# Altium PCB DG_V3.PcbDoc
Units mm, origin at the board's own origin, x right, y up, seen from the top; angles counter-clockwise.
Board outline 103.5 x 49.53 mm, 2 copper layers (Top Layer, Bottom Layer); 132 components, 84 nets, 431 pads, 72 vias.
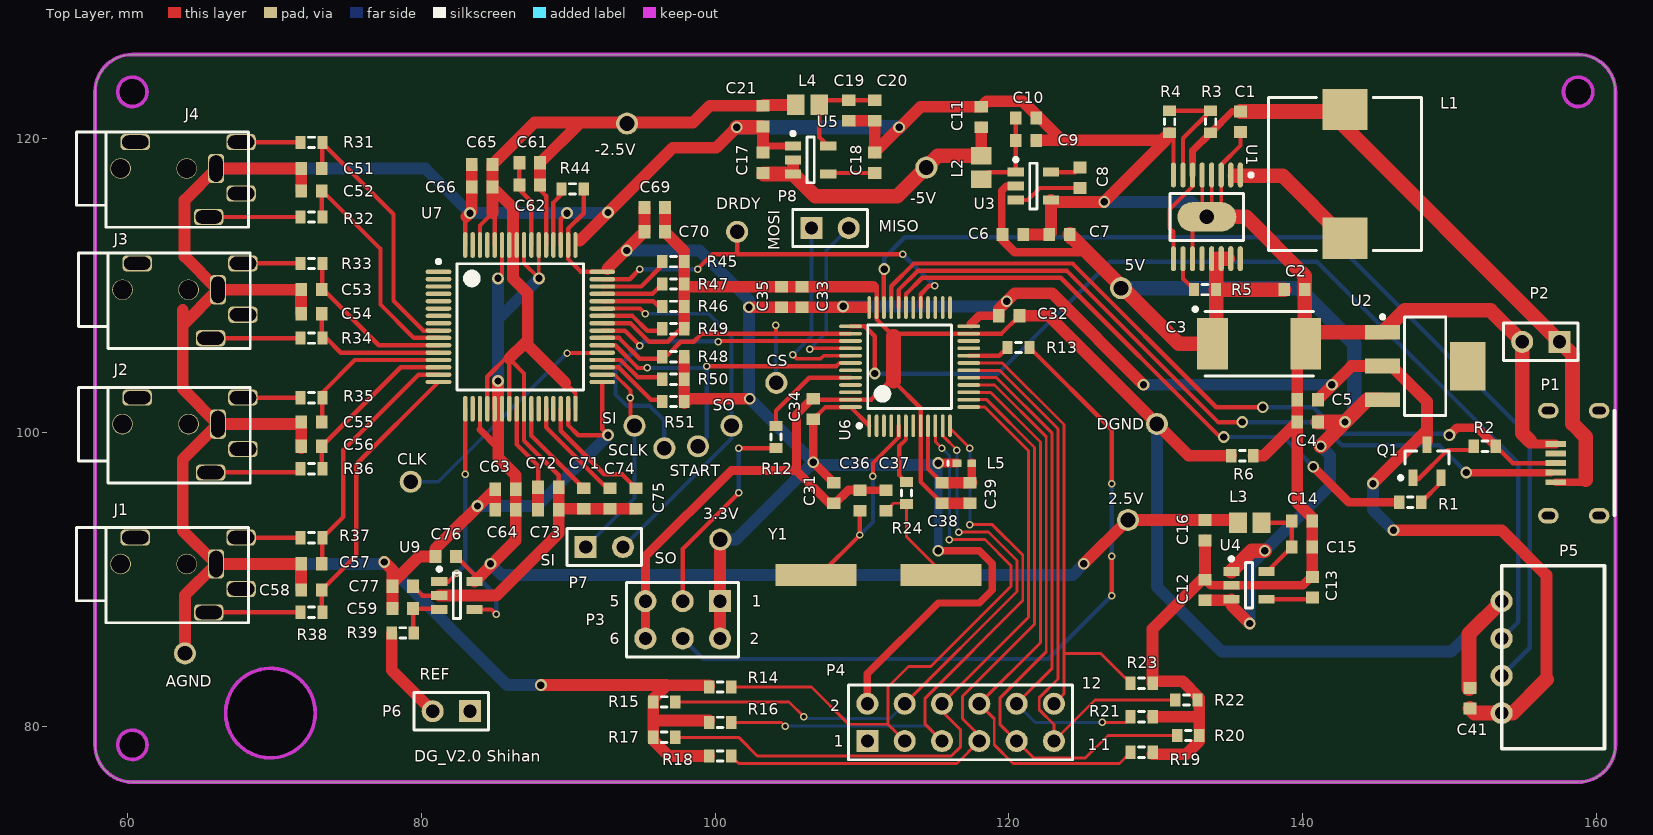
[diagram p0: Top Layer view]
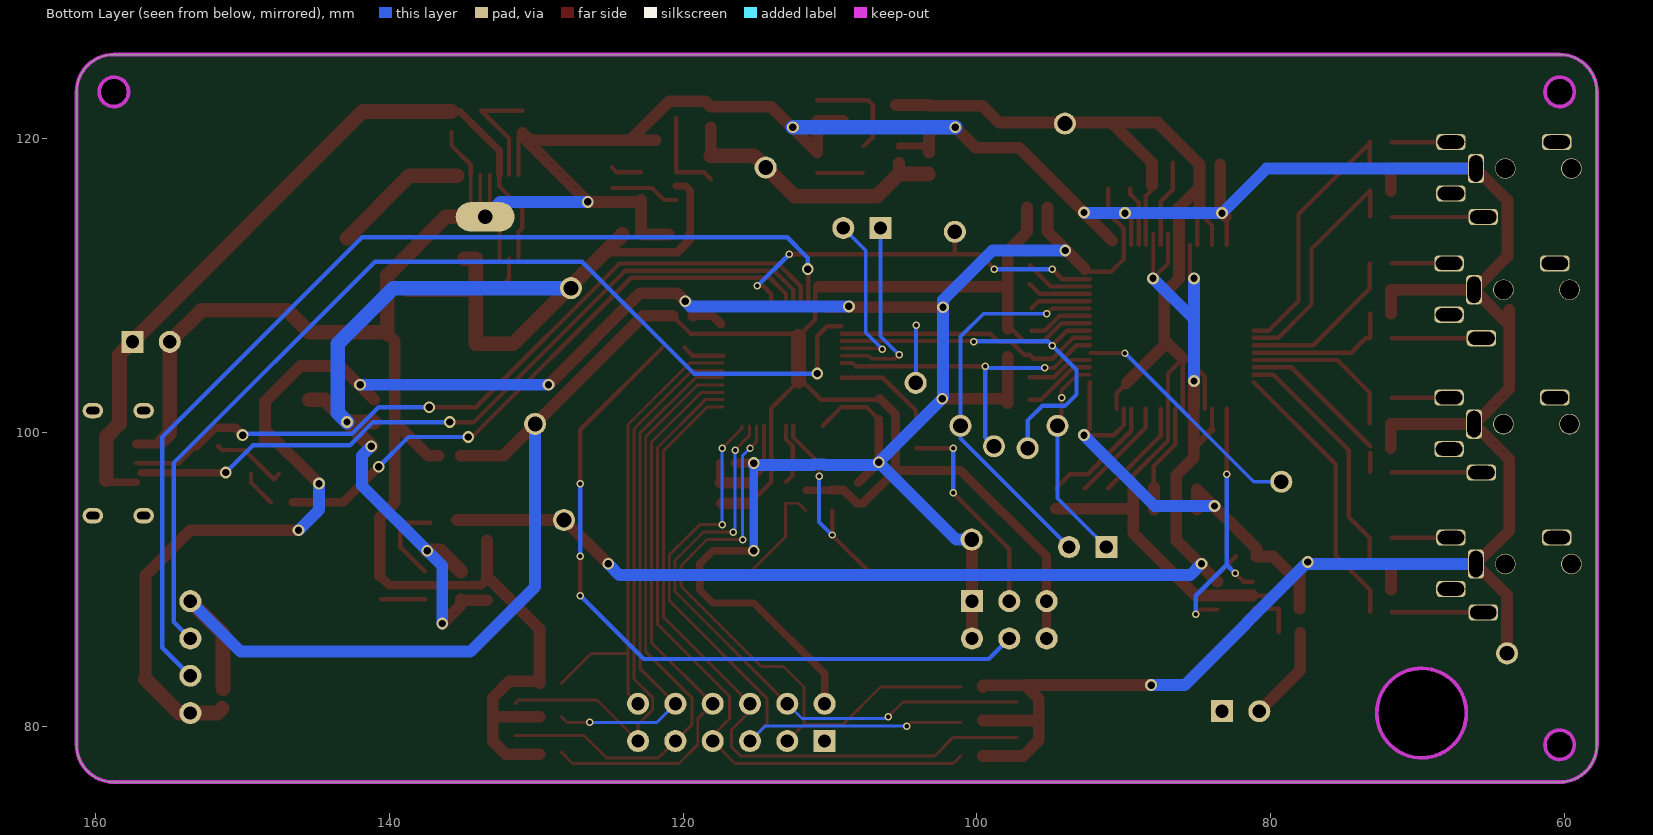
[diagram p1: Bottom Layer view, seen from below]

## Layer stack, top to bottom
Top Solder: solder mask 0.0102, Solder Resist, Dk 3.5
Top Layer: signal copper 0.0356
Dielectric 1: dielectric 0.32, FR-4, Dk 4.8
Bottom Layer: signal copper 0.0356
Bottom Solder: solder mask 0.0102, Solder Resist, Dk 3.5

## Board outline
60.325,76.2 cw(c60.325,78.74) 57.785,78.74 57.785,123.19 cw(c60.325,123.19) 60.325,125.73 158.75,125.73 cw(c158.75,123.19) 161.29,123.19 161.29,78.74 cw(c158.75,78.74) 158.75,76.2
cut-out: 157.75,123.19 ccw(c158.75,123.19) 158.75,122.19 ccw(c158.75,123.19) 159.75,123.19 ccw(c158.75,123.19) 158.75,124.19 ccw(c158.75,123.19)
cut-out: 60.325,122.19 cw(c60.325,123.19) 59.325,123.19 cw(c60.325,123.19) 60.325,124.19 cw(c60.325,123.19) 61.325,123.19 cw(c60.325,123.19)
cut-out: 60.325,77.74 cw(c60.325,78.74) 59.325,78.74 cw(c60.325,78.74) 60.325,79.74 cw(c60.325,78.74) 61.325,78.74 cw(c60.325,78.74)
cut-out: 69.723,77.849 cw(c69.723,80.899) 66.673,80.899 cw(c69.723,80.899) 69.723,83.949 cw(c69.723,80.899) 72.773,80.899 cw(c69.723,80.899)

## Design rules (kind name [scope] priority, off if disabled: settings)
Clearance [All] p1: gap=0.15
PolygonConnect [All] p1: connectstyle=Relief reliefconductorwidth=0.254 reliefentries=4 polygonreliefangle="90 Angle" airgapwidth=0.254
RoutingVias [All] p1: holewidth=0.5 width=0.8 viastyle="Through Hole" minholewidth=0.305 minwidth=0.508 maxholewidth=7 maxwidth=7
SolderMaskExpansion [All] p1: expansion=0.102
Width [All] p1: maxlimit=1 minlimit=0.15 preferedwidth=0.2
30 further rules are at their usual default settings.

## Classes and differential pairs
component class DG_V3: C51 C52 C53 C54 C55 C56 C57 C58 C59 C61 C62 C63 C64 C65 C66 C69 C70 C71 C72 C73 C74 C75 C76 C77 CLK CS DRDY J1 J2 J3 J4 P6 P7 P8 R31 R32 R33 R34 R35 R36 R37 R38 R39 R44 R45 R46 R47 R48 R49 R50 R51 SCLK SI SO START U7 U9
component class PowerSupply: 2.5V 3.3V 5V -2.5V -5V AGND C1 C2 C3 C4 C5 C6 C7 C8 C9 C10 C11 C12 C13 C14 C15 C16 C17 C18 C19 C20 C21 DGND L1 L2 L3 L4 P1 P2 Q1 R1 R2 R3 R4 R5 R6 U1 U2 U3 U4 U5
component class MPU: C31 C32 C33 C34 C35 C36 C37 C38 C39 C41 L5 P3 P4 P5 R12 R13 R14 R15 R16 R17 R18 R19 R20 R21 R22 R23 R24 U6 Y1

## Components (designator, comment, footprint, x,y, rotation, side; value= is the part's Value field where it differs from the comment)
2.5V "TP" TestPort 128.081,94.045 r90 top
3.3V "TP" TestPort 100.33,92.71 r90 top
5V "TP" TestPort 127.635,109.855 r0 top
-2.5V "TP" TestPort 93.98,121.031 r90 top
-5V "TP" TestPort 114.351,118.034 r90 top
AGND "TP" TestPort 63.881,84.963 r90 top
C1 "10uF" 1608[0603] 135.763,121.158 r90 top
C2 "2.2uF" 1608[0603] 139.446,109.728 r180 top
C3 "220uF" 6TPF220M5L 137.033,106.045 r0 top
C4 "10uF" 1608[0603] 140.335,100.711 r180 top
C5 "10uF" 1608[0603] 140.335,102.235 r180 top
C6 "10uF" 1608[0603] 120.269,113.476 r180 top
C7 "1uF" 1608[0603] 123.444,113.476 r0 top
C8 "1uF" 1608[0603] 124.841,117.348 r90 top
C9 "10uF" 1608[0603] 121.158,119.888 r180 top
C10 "1uF" 1608[0603] 121.158,121.412 r180 top
C11 "10uF" 1608[0603] 118.11,121.477 r270 top
C12 "1uF" 1608[0603] 133.35,89.281 r270 top
C13 "1uF" 1608[0603] 140.659,89.469 r270 top
C14 "2.2uF" 1608[0603] 139.954,93.98 r180 top
C15 "10uF" 1608[0603] 139.954,92.202 r180 top
C16 "10uF" 1608[0603] 133.35,93.345 r90 top
C17 "2.2uF" 1608[0603] 103.251,118.364 r270 top
C18 "10nF" 1608[0603] 110.871,118.364 r270 top
C19 "2.2uF" 1608[0603] 109.093,121.92 r90 top
C20 "10uF" 1608[0603] 110.871,121.92 r90 top
C21 "10uF" 1608[0603] 103.251,121.539 r90 top
C31 "100nF" 1608[0603] 108.077,95.885 r90 top
C32 "100nF" 1608[0603] 120.015,107.95 r180 top
C33 "100nF" 1608[0603] 105.918,109.22 r270 top
C34 "100nF" 1608[0603] 106.68,101.6 r270 top
C35 "10uF" 1608[0603] 104.521,109.22 r270 top
C36 "20pF" 1608[0603] 109.855,95.377 r270 top
C37 "20pF" 1608[0603] 111.633,95.377 r270 top
C38 "1uF" 1608[0603] 115.443,95.885 r90 top
C39 "100nF" 1608[0603] 117.348,95.885 r90 top
C41 "10uF" 1608[0603] 151.384,81.915 r270 top
C51 "4.7nF" 1608[0603] 72.517,117.971 r0 top
C52 "4.7nF" 1608[0603] 72.517,116.447 r180 top
C53 "4.7nF" 1608[0603] 72.517,109.728 r0 top
C54 "4.7nF" 1608[0603] 72.517,108.077 r180 top
C55 "4.7nF" 1608[0603] 72.517,100.711 r0 top
C56 "4.7nF" 1608[0603] 72.517,99.06 r180 top
C57 "4.7nF" 1608[0603] 72.517,91.059 r0 top
C58 "4.7nF" 1608[0603] 72.517,89.281 r180 top
C59 "4.7nF" 1608[0603] 78.74,88.011 r0 top
C61 "100nF" 1608[0603] 87.376,118.364 r180 top
C62 "1uF" 1608[0603] 87.376,116.84 r180 top
C63 "1uF" 1608[0603] 85.725,96.139 r0 top
C64 "0.1uF" 1608[0603] 85.725,94.742 r0 top
C65 "1uF" 1608[0603] 84.136,118.237 r0 top
C66 "0.1uF" 1608[0603] 84.136,116.713 r0 top
C69 "1uF" 1608[0603] 95.885,115.316 r180 top
C70 "0.1uF" 1608[0603] 95.885,113.665 r180 top
C71 "1uF" 1608[0603] 91.059,95.504 r90 top
C72 "10uF" 1608[0603] 88.646,96.266 r0 top
C73 "100nF" 1608[0603] 88.646,94.742 r0 top
C74 "100uF" 1608[0603] 92.837,95.504 r90 top
C75 "1uF" 1608[0603] 94.615,95.504 r90 top
C76 "1uF" 1608[0603] 81.661,91.567 r0 top
C77 "1uF" 1608[0603] 78.74,89.535 r0 top
CLK "TP" TestPort 79.248,96.647 r90 top
CS "TP" TestPort 104.14,103.378 r90 top
DGND "TP" TestPort 130.048,100.584 r90 top
DRDY "TP" TestPort 101.473,113.665 r90 top
J1 "PJ_230" PJ_230 63.627,90.297 r0 top
J2 "PJ_230" PJ_230 63.754,99.822 r0 top
J3 "PJ_230" PJ_230 63.754,108.966 r0 top
J4 "PJ_230" PJ_230 63.627,117.221 r0 top
L1 "6.8uH" B82464G4682M 142.875,117.602 r270 top
L2 "3.3uH" 2029 118.11,118.048 r90 top
L3 "3.3uH" 2029 136.398,93.853 r180 top
L4 "3.3uH" 2029 106.299,122.301 r180 top
L5 "GZ1005D601TF" 0402-A 116.967,97.917 r0 top
P1 "Micro-USB" Micro-USB 157.226,97.917 r90 top
P2 "Header 2" HDR1X2 157.48,106.172 r180 top
P3 "Jumper" HDR2X3 100.33,88.519 r180 top
P4 "Header 6X2" HDR2X6 110.363,78.994 r0 top
P5 "Header 4" XH4 153.543,84.709 r270 top
P6 "Header 2" HDR1X2 83.312,81.026 r180 top
P7 "Header 2" HDR1X2 91.186,92.202 r0 top
P8 "Header 2" HDR1X2 106.553,113.919 r0 top
Q1 "PNP" SOT-23B_N 148.463,98.044 r90 top
R1 "10K" J1-0603 147.32,95.25 r0 top
R2 "1K" J1-0603 152.4,99.06 r0 top
R3 "1M" J1-0603 133.731,121.158 r270 top
R4 "240K" J1-0603 130.937,121.158 r90 top
R5 "100K" J1-0603 133.35,109.728 r0 top
R6 "0K" J1-0603 135.89,98.425 r180 top
R12 "10K" J1-0603 104.14,99.695 r270 top
R13 "10K" J1-0603 120.65,105.791 r180 top
R14 "15K" J1-0603 100.342,82.677 r180 top
R15 "15K" J1-0603 96.532,81.661 r180 top
R16 "15K" J1-0603 100.342,80.264 r180 top
R17 "15K" J1-0603 96.532,79.248 r180 top
R18 "15K" J1-0603 100.342,77.978 r180 top
R19 "10K" J1-0603 129.032,78.232 r0 top
R20 "10K" J1-0603 132.207,79.375 r0 top
R21 "10K" J1-0603 129.032,80.645 r0 top
R22 "10K" J1-0603 132.08,81.788 r0 top
R23 "10K" J1-0603 129.032,82.931 r0 top
R24 "0K" J1-0603 113.03,95.885 r90 top
R31 "4.99K" J1-0603 72.517,119.749 r0 top
R32 "4.99K" J1-0603 72.517,114.669 r0 top
R33 "4.99K" J1-0603 72.517,111.506 r0 top
R34 "4.99K" J1-0603 72.517,106.426 r0 top
R35 "4.99K" J1-0603 72.517,102.362 r0 top
R36 "4.99K" J1-0603 72.517,97.536 r0 top
R37 "4.99K" J1-0603 72.517,92.837 r0 top
R38 "4.99K" J1-0603 72.517,87.757 r0 top
R39 "4.99K" J1-0603 78.74,86.36 r180 top
R44 "10K" J1-0603 90.297,116.586 r180 top
R45 "10K" J1-0603 97.155,111.633 r180 top
R46 "10K" J1-0603 97.155,108.585 r180 top
R47 "10K" J1-0603 97.155,110.109 r180 top
R48 "10K" J1-0603 97.155,105.156 r180 top
R49 "10K" J1-0603 97.155,107.061 r180 top
R50 "10K" J1-0603 97.155,103.632 r180 top
R51 "10K" J1-0603 97.155,102.108 r180 top
SCLK "TP" TestPort 96.52,98.933 r90 top (schematic designator CLK)
SI "TP" TestPort 94.488,100.457 r90 top
SO "TP" TestPort 101.092,100.457 r90 top
START "TP" TestPort 98.806,99.06 r90 top
U1 "TPS6103" TI_PWP_G16 133.477,114.681 r270 top
U2 "LM1117MPX-3.3" MP04A_N 148.336,104.521 r0 top
U3 "TPS60403DBVR" TI-DBV5_N 121.666,116.778 r0 top
U4 "TPS73225DBVR" TI-DBV5_N 136.341,89.596 r0 top
U5 "TPS72325DBVR" TI-DBV5_N 106.496,118.552 r0 top
U6 "STM32F103C6" STM32F103C8T6 110.49,100.457 r90 top
U7 "ADS1299" PQFP-64N 86.741,107.188 r0 top
U9 "OPA376AIDBVR" TI-DBV5_N 82.423,88.9 r0 top
Y1 "XTAL" Crystal_HCM49 111.125,90.297 r0 top

## Footprints (in the part's own frame and the unit in brackets; to place one, negate y for a bottom-side part, rotate by r counter-clockwise, add the part's x,y. Pads: shape width x height; smd on the part's side, far side on the other; paste and mask are expansions set on the pad)
6TPF220M5L [mm] "Molded Capacitor, 2-Leads, Body 7.3x4.3mm, IPC Medium Density"
  rect 2.1x3.5 smd: 1(-3.175,0) 2(3.175,0)
  silkscreen extent -4.47,-2.2 3.7,2.47, body extent -3.65,-2.15 3.65,2.15, height 2.8
0402-A [mm] "Chip Inductor, Body 1.0x0.5mm, IPC High Density"
  rect 0.6x0.5 smd: 1(-0.5,0) 2(0.5,0)
  silkscreen extent -1.1,-0.15 -1.1,0.15, body extent -0.55,-0.3 0.55,0.3, height 0.55
1608[0603] [mm] "Chip Capacitor, Body 1.6x0.8mm, IPC High Density"
  rect 0.8x0.9 smd: 1(-0.7,0) 2(0.7,0)
  body extent -0.87,-0.48 0.87,0.48, height 1.3
2029 [mm] "Chip Inductor, Body 2.0x1.2mm, IPC High Density"
  rect 1.2x1.4 smd: 1(-0.8,0) 2(0.8,0)
  body extent -1.1,-0.7 1.1,0.7, height 0.55
B82464G4682M [mm] "Precision Wire Wound Inductor, 2-Leads, Body 10.4x10.4mm, IPC Medium Density"
  rect 2.8x3.05 smd: 1(-4.375,0) 2(4.375,0)
  silkscreen extent -5.2,-5.2 5.2,5.2, body extent -5.2,-5.2 5.2,5.2, height 4.8
Crystal_HCM49 [mm]
  rect 5.5x1.5 smd: 1(-4.25,0) 2(4.25,0)
HDR1X2 [mm] "Connector; Header; 2 Position"
  rect 1.5x1.5 hole 0.9: 1(0,0)
  round 1.5 hole 0.9: 2(2.54,0)
  silkscreen extent -1.27,-1.27 3.81,1.27
HDR2X3 [mm] "Connector; Header; 3x2 Position"
  rect 1.5x1.5 hole 0.9: 1(0,0)
  round 1.5 hole 0.9: 2(0,2.54) 3(2.54,0) 4(2.54,2.54) 5(5.08,0) 6(5.08,2.54)
  silkscreen extent -1.27,-1.27 6.35,3.81
HDR2X6 [mm] "Connector; Header; 6x2 Position"
  rect 1.5x1.5 hole 0.9: 1(0,0)
  round 1.5 hole 0.9: 2(0,2.54) 3(2.54,0) 4(2.54,2.54) 5(5.08,0) 6(5.08,2.54) 7(7.62,0) 8(7.62,2.54) 9(10.16,0) 10(10.16,2.54) 11(12.7,0) 12(12.7,2.54)
  silkscreen extent -1.27,-1.27 13.97,3.81
J1-0603 [mm] "Chip Resistor, Body 1.6x0.8mm, IPC High Density"
  rect 0.7x0.9 smd: 1(-0.75,0) 2(0.75,0)
  silkscreen extent -0.2,-0.35 0.2,0.35, body extent -0.85,-0.48 0.85,0.48, height 0.9
Micro-USB [mm]
  oval 1.05x1.4 hole 0.5 slot 0.9 at 90 deg: 0(-3.575,-2.95) 0(-3.575,0.5) 0(3.575,-2.95) 0(3.575,0.5)
  rect 0.4x1.4 smd: 1(-1.3,0) 2(-0.65,0) 3(0,0) 4(0.65,0) 5(1.3,0)
  silkscreen extent -3.56,-4 3.56,-4
MP04A_N [mm] "SOT223, 4-Leads, Body 6.5x3.5mm, Pitch 2.3mm, Lead Span 7mm, IPC Medium Density"
  rect 2.4x1 smd: 1(-2.9,2.3) 2(-2.9,0) 3(-2.9,-2.3)
  rect 2.4x3.3 smd: 4(2.9,0)
  silkscreen extent -3.02,-3.35 1.4,3.47, body extent -1.85,-3.35 1.85,3.35, height 1.8
PJ_230 [mm] "Phone Jack 2.5mm"
  round 1.4 hole 1.3: 1(-4.1,0.75) 1(0.4,0.75)
  rrect50% 2x1.1 hole 0.9 slot 1.8 at 0 deg: 2(1.9,-2.55) 3(-3.1,2.55) 5(4.1,2.55) 6(4.1,-0.95)
  rrect50% 1.1x2 hole 0.9 slot 1.8 at 90 deg: 4(2.4,0.75)
  silkscreen extent -7.1,-3.25 4.6,3.25
PQFP-64N [mm] "TSQFP, 64-Leads, Body 12.2x12.2mm (max), Pitch 0.50mm, IPC Medium Density ADS1299"
  oval 1.75x0.3 smd: 1(-5.575,3.75) 2(-5.575,3.25) 3(-5.575,2.75) 4(-5.575,2.25) 5(-5.575,1.75) 6(-5.575,1.25) 7(-5.575,0.75) 8(-5.575,0.25) 9(-5.575,-0.25) 10(-5.575,-0.75) 11(-5.575,-1.25) 12(-5.575,-1.75) 13(-5.575,-2.25) 14(-5.575,-2.75) 15(-5.575,-3.25) 16(-5.575,-3.75) 33(5.575,-3.75) 34(5.575,-3.25) 35(5.575,-2.75) 36(5.575,-2.25) 37(5.575,-1.75) 38(5.575,-1.25) 39(5.575,-0.75) 40(5.575,-0.25) 41(5.575,0.25) 42(5.575,0.75) 43(5.575,1.25) 44(5.575,1.75) 45(5.575,2.25) 46(5.575,2.75) 47(5.575,3.25) 48(5.575,3.75)
  oval 0.3x1.75 smd: 17(-3.75,-5.575) 18(-3.25,-5.575) 19(-2.75,-5.575) 20(-2.25,-5.575) 21(-1.75,-5.575) 22(-1.25,-5.575) 23(-0.75,-5.575) 24(-0.25,-5.575) 25(0.25,-5.575) 26(0.75,-5.575) 27(1.25,-5.575) 28(1.75,-5.575) 29(2.25,-5.575) 30(2.75,-5.575) 31(3.25,-5.575) 32(3.75,-5.575) 49(3.75,5.575) 50(3.25,5.575) 51(2.75,5.575) 52(2.25,5.575) 53(1.75,5.575) 54(1.25,5.575) 55(0.75,5.575) 56(0.25,5.575) 57(-0.25,5.575) 58(-0.75,5.575) 59(-1.25,5.575) 60(-1.75,5.575) 61(-2.25,5.575) 62(-2.75,5.575) 63(-3.25,5.575) 64(-3.75,5.575)
  silkscreen extent -5.7,-4.3 4.3,4.57, body extent -5,-5 5,5, height 1.2
SOT-23B_N [mm] "SOT23, 3-Leads, Body 2.9x1.3mm, Pitch 0.95mm, Lead Span 2.4mm, IPC Medium Density"
  rect 1.15x0.6 smd: 1(-1.125,0.95) 2(-1.125,-0.95) 3(1.125,0)
  silkscreen extent -1.25,-1.5 0.7,1.92, body extent -0.7,-1.5 0.7,1.5, height 1.14
STM32F103C8T6 [mm] "IC MCU 32BIT 64KB FLASH 48LQFP"
  oval 1.55x0.25 smd: 1(0,0) 2(0,-0.5) 3(0,-1) 4(0,-1.5) 5(0,-2) 6(0,-2.5) 7(0,-3) 8(0,-3.5) 9(0,-4) 10(0,-4.5) 11(0,-5) 12(0,-5.5) 25(8.05,-5.5) 26(8.05,-5) 27(8.05,-4.5) 28(8.05,-4) 29(8.05,-3.5) 30(8.05,-3) 31(8.05,-2.5) 32(8.05,-2) 33(8.05,-1.5) 34(8.05,-1) 35(8.05,-0.5) 36(8.05,0)
  oval 0.25x1.55 smd: 13(1.275,-6.775) 14(1.775,-6.775) 15(2.275,-6.775) 16(2.775,-6.775) 17(3.275,-6.775) 18(3.775,-6.775) 19(4.275,-6.775) 20(4.775,-6.775) 21(5.275,-6.775) 22(5.775,-6.775) 23(6.275,-6.775) 24(6.775,-6.775) 37(6.775,1.275) 38(6.275,1.275) 39(5.775,1.275) 40(5.275,1.275) 41(4.775,1.275) 42(4.275,1.275) 43(3.775,1.275) 44(3.275,1.275) 45(2.775,1.275) 46(2.275,1.275) 47(1.775,1.275) 48(1.275,1.275)
  silkscreen extent -0.12,-5.6 6.88,0.8, body extent 0.53,-6.25 7.52,0.75, height 1.6
TestPort [mm]
  round 1.5 hole 1: 0(0,-0.025)
TI-DBV5_N [mm] "SOT23, 5-Leads, Body 2.9x1.6mm, Pitch 0.95mm, IPC Medium Density"
  rect 1.1x0.6 smd: 1(-1.2,0.95) 2(-1.2,0) 3(-1.2,-0.95) 4(1.2,-0.95) 5(1.2,0.95)
  silkscreen extent -1.32,-1.55 0.25,1.92, body extent -0.87,-1.52 0.87,1.53, height 1.45
TI_PWP_G16 [mm]
  oval 1.7x0.35 smd: 1(-2.85,2.275) 2(-2.85,1.625) 3(-2.85,0.975) 4(-2.85,0.325) 5(-2.85,-0.325) 6(-2.85,-0.975) 7(-2.85,-1.625) 8(-2.85,-2.275) 9(2.85,-2.275) 10(2.85,-1.625) 11(2.85,-0.975) 12(2.85,-0.325) 13(2.85,0.325) 14(2.85,0.975) 15(2.85,1.625) 16(2.85,2.275)
  oval 2x4 hole 1: 3(0,0)
  Top Layer lines w0.254: 0.508,-1.016 0.549,-0.975 2.85,-0.975 ; -0.762,-0.325 -1.981,-0.325 -2.85,-0.325 ; -2.85,0.325 -0.945,0.325 -0.762,0.508 ; -2.85,0.975 -0.803,0.975 -0.762,1.016
  silkscreen extent -2.97,-2.5 1.6,3.13
XH4 [mm] "2.54mm"
  round 1.5 hole 0.9: 1(3.81,0) 2(1.27,0) 3(-1.27,0) 4(-3.81,0)
  silkscreen extent -6.22,0 6.23,7

## Part data
2.5V 3.3V 5V -2.5V -5V AGND CLK CS DGND DRDY SCLK SI SO START: library part TestPoint
C1 C2 C4 C5 C6 C7 C8 C9 C10 C11 C12 C13 C14 C15 C16 C17 C18 C19 C20 C21 C31 C32 C33 C34 C35 C36 C37 C38 C39 C41 C51 C52 C53 C54 C55 C56 C57 C58 C59 C61 C62 C63 C64 C65 C66 C69 C70 C71 C72 C73 C74 C75 C76 C77: library part Cap, "Capacitor"
C3: library part "Cap Pol1", "Polarized Capacitor (Radial)"
J1 J2 J3 J4: "Phone Jack"
L1 L2 L3 L4 L5: library part Inductor, "Inductor"
P2 P6 P7 P8: "Header, 2-Pin"
P3: library part "Header 3X2", "Header, 3-Pin, Dual row"
P4: "Header, 6-Pin, Dual row"
P5: "Header, 4-Pin"
Q1: "PNP Bipolar Transistor"
R1 R2 R3 R4 R5 R6 R12 R13 R14 R15 R16 R17 R18 R19 R20 R21 R22 R23 R24 R31 R32 R33 R34 R35 R36 R37 R38 R39 R44 R45 R46 R47 R48 R49 R50 R51: library part Res1, "Resistor"
U2: "800mA Low-Dropout Linear Regulator, 4-pin SOT-223"
U3: "-1.8 to -5.25 V, Inverting Charge Pump Regulator, 60 mA, 1.8 to 5.25 V Input with 2-Cell Alkaline / Nixx Input, -40 to 85 degC, 5-pin SOT23 (DBV5), Green (RoHS & no Sb/Br)"
U4: "Single Output Fast Transient Response LDO, 250 mA, Fixed 2.5 V Output, 1.7 to 5.5 V Input, with Reverse Current Protection, 5-pin SOT-23 (DBV), -40 to 85 degC, Green (RoHS & no Sb/Br)"
U5: "Single Output High PSRR LDO, 200 mA, Fixed -2.5 V Output, -10 to -2.7 V Input, 5-pin SOT-23 (DBV), -40 to 125 degC, Green (RoHS & no Sb/Br)"
U6: library part STM32F103C8T6, "IC MCU 32BIT 64KB FLASH 48LQFP"
U9: "Precision, Low Noise, Low Iq Operational Amplifier, 2.2 to 5.5 V, -40 to 125 degC, 5-pin SOT23 (DBV5), Green (RoHS & no Sb/Br)"
Y1: "Crystal Oscillator"

## Via types
v1: diameter 0.8, hole 0.5, Top Layer to Bottom Layer, 39 vias
v2: diameter 0.508, hole 0.305, Top Layer to Bottom Layer, 33 vias

## Nets (pads, with @x,y where several pads share a name; then routed paths per layer and width w, separated by ;. In a path a pad name is that pad's centre, name@x,y a point inside that pad or via, vN(x,y) a via of type N, cw(c..) or ccw(c..) an arc to the next point about the centre after c; other vN are vias at no path point)
5V: 5V.0 C2.2 C3.1 C4.1 C6.2 C7.2 C12.2 R5.2 U1.13 U1.14 U1.15 U2.3 U3.2 U4.1 U4.3 | length 86.7
  Top Layer w0.5: C6.2 119.516,113.476 119.516,116.468 119.826,116.778 U3.2
  Top Layer w0.6: C6.2 119.569,113.095 120.396,112.268 125.349,112.268 ; C7.2@124.144,113.095 C7.2
  Top Layer w0.8: C12.2 U4.3@135.076,88.581 ; U4.3 135.141,88.252 v1(136.398,86.995)
  Top Layer w1: C7.2 131.575,106.045 C3.1 ; R5.2 R5.2@134.112,109.728 ; C3.1@134.112,106.045 R5.2@134.112,109.728 ; 134.874,111.831 U1.14 134.112,111.831 R5.2@134.112,109.728 ; U4.1 136.543,91.948 v1(137.414,91.948) ; C2.2 R5.2@134.112,109.728 ; C4.1 v1(142.875,100.711) ; v1(141.224,99.06) v1(142.875,100.711) ; U2.3 144.385,102.221 v1(142.875,100.711)
  Bottom Layer w0.8: v1(136.398,86.995) 136.398,90.932 v1(137.414,91.948) 141.859,96.393 141.859,98.425 v1(141.224,99.06)
  Bottom Layer w1: 5V.0 139.725,109.83 143.51,106.045 143.51,101.346 v1(142.875,100.711)
+2.5V: 2.5V.0 C16.2 C63.2 C64.2 C76.2 L3.2 U7.19 U7.21 U7.22 U7.54 U7.56 U7.59 U9.5 | length 92.9
  Top Layer w0.254: U7.56@86.991,113.525 U7.56 86.991,111.51 87.991,110.51 U7.54 U7.54@87.991,113.525
  Top Layer w0.3: C76.2 83.623,90.305 U9.5 ; 83.991,100.203 U7.19 ; v1(85.217,110.49) 85.491,110.764 U7.59
  Top Layer w0.5: 83.991,100.203 85.187,99.006
  Top Layer w0.8: U9.5 86.425,92.652 C64.2 C63.2 86.425,97.09 85.241,98.274 85.241,101.613 ; 85.217,101.637 v1(85.217,103.505) ; v1(125.095,91.059) 128.081,94.045 C16.2 L3.2@135.406,94.045
  Bottom Layer w0.8: v1(84.709,91.059) 85.471,90.297 124.333,90.297 v1@125.034,90.998 ; v1(85.217,103.505) 85.217,107.696 ; v1(85.217,110.49) 85.217,107.696 ; v1(88.011,110.49) 85.217,107.696
-2.5V: -2.5V.0 C21.2 C61.1 C62.1 C65.2 C66.2 C71.1 C72.2 C73.2 C74.1 C75.1 C77.2 L4.2 U7.20 U7.23 U7.25 U7.32 U7.53 U7.57 U7.58 U7.60 U7.62 U9.2 | length 96.6
  Top Layer w0.3: C77.2 80.075,88.9 U9.2 ; U7.62 83.991,114.09 84.836,114.935 ; U7.20 84.491,103.795 85.864,105.168 ; U7.60 84.991,114.78 ; U7.23 85.991,105.041 ; 86.181,104.827 86.991,104.017 U7.25 86.991,99.445 89.346,97.09 C72.2 ; C62.1 88.076,116.521 88.491,116.106 U7.53 ; 89.789,103.378 90.491,102.676 U7.32
  Top Layer w0.8: U9.2 85.09,88.9 89.346,93.156 C73.2 C72.2 ; 84.836,114.935 C66.2 ; 85.991,105.041 87.058,106.108 89.789,103.378 ; 87.249,105.918 87.249,109.474 86.233,110.49 86.233,115.316 C66.2 ; C62.1 C61.1 90.805,121.093 ; C73.2@89.408,94.804 C71.1 C74.1 C75.1 ; C21.2 99.633,122.239 98.49,121.096 87.695,121.096 C65.2 C66.2 ; C21.2@103.313,122.301 L4.2
-5V: -5V.0 C11.2 C17.2 L2.2 U5.2 U5.3 | length 19.3
  Top Layer w0.8: U5.3 U5.2@105.296,118.364 ; L2.2 C11.2
  Top Layer w1: C17.2@103.313,117.602 U5.3 106.82,116.078 112.395,116.078 115.165,118.848 117.07,118.848 L2.2
AGND: AGND.0 C1.1 C2.1 C3.2 C4.2 C5.2 C6.1 C7.1 C9.1 C10.1 C11.1 C12.1 C13.1 C14.1 C15.1 C16.1 C17.1 C18.1 C19.1 C20.1 C21.1 C51.1 C52.2 C53.1 C54.2 C55.1 C56.2 C57.1 C58.2 C59.1 C63.1 C64.1 C65.1 C66.1 C76.1 C77.1 J1.4 J2.4 J3.4 J4.4 P1.5 P2.2 R4.1 R6.1 R14.2 R15.2 R16.2 R17.2 R18.2 R19.2 R20.2 R21.2 R22.2 R23.2 U1.3 U1.4 U1.5 U1.8 U1.11 U2.1 U3.4 U4.2 U5.1 U7.31 U7.33 U7.49 U7.51 U7.64 | length 366.9
  Top Layer w0.3: U7.64 82.991,114.614 v1@83.058,114.681 ; U7.51 89.491,114.51 v1(89.916,114.935) ; U7.31 89.991,100.509 90.678,99.822 v1(92.71,99.822) 92.316,100.216 U7.33 ; R4.1 131.202,120.143 U1.8 ; U1.3@132.715,114.681 U1.3@133.477,114.681 ; U1.3@134.452,117.531 134.452,118.228 135.763,119.539 C1.1
  Top Layer w0.5: 103.383,119.502 U5.1
  Top Layer w0.6: C12.1 133.735,89.596 U4.2 140,89.596 C13.1@140.654,90.25 ; 155.448,99.217 P1.5
  Top Layer w0.8: 63.754,107.316 J3.4 ; 63.754,108.332 63.754,102.972 J2.4 63.754,98.172 63.754,93.32 J1.4 ; AGND.0 63.906,88.926 J1.4 ; J2.4@66.166,100.584 71.817,100.584 C56.2@71.817,98.933 ; C51.1@71.678,117.971 J4.4 63.881,115.825 63.881,111.989 J3.4 ; C58.2@71.805,89.293 71.805,91.047 J1.4 ; C54.2@71.805,108.089 71.805,109.716 J3.4 ; C52.2 C51.1 ; v1(77.47,91.186) 78.04,90.616 C77.1@78.04,89.763 ; C59.1 C77.1 C77.1@78.04,89.763 ; v1@83.058,114.681 v1(83.312,114.935) 83.436,115.059 C66.1 C65.1 ; C64.1 C63.1 80.961,92.075 C76.1 79.844,91.567 C77.1@78.04,89.763 ; v1(88.138,82.804) 96.688,82.804 96.307,82.423 ; 90.782,113.053 v1(92.71,114.982) 97.108,119.38 100.076,119.38 v1(101.473,120.777) ; R17.2@95.782,79.043 96.847,77.978 R18.2 ; R17.2@95.782,79.121 95.782,81.866 96.704,82.788 99.592,82.788 R14.2 ; 95.782,80.391 R16.2@99.592,80.391 ; C17.1 C21.1 ; C19.1 C20.1 C18.1 113.984,122.177 115.889,122.177 C11.1 118.488,122.555 120.943,122.555 123.382,120.116 ; C6.1 C7.1 122.866,113.598 U3.4@122.866,115.698 ; C9.1 130.417,119.888 ; U3.4 U3.4@122.866,115.698 ; R19.2@129.782,78.105 132.08,78.105 132.957,78.982 132.957,80.645 ; R21.2 132.957,80.645 ; R23.2 129.782,86.641 133.122,89.981 C12.1 C16.1 ; R23.2@130.036,83.058 131.826,83.058 132.957,81.927 132.957,80.645 ; R4.1 130.417,119.888 ; R6.1 137.349,98.425 C4.2 ; C3.2@140.259,106.821 140.146,106.708 139.635,106.197 C5.2 C4.2 ; C13.1@140.654,90.25 C15.1 C14.1 140.654,94.208 139.635,95.227 C4.2 ; U3.4@122.866,115.698 v1(126.493,115.698) 130.683,119.888 130.417,119.888
  Top Layer w1: v1(101.473,120.777) C21.1@103.189,120.777 ; U1.3@133.477,114.681 136.144,114.681 140.146,110.679 C2.1 C3.2@140.146,106.708 ; C3.2@140.259,106.821 U2.1 146.946,108.331 152.781,108.331 P2.2 154.94,99.949 155.448,99.441
  Bottom Layer w0.8: J1.4 77.331,91.047 v1(77.47,91.186) 85.852,82.804 v1(88.138,82.804) ; J4.4 80.276,117.971 v1(83.312,114.935) v1(89.916,114.935) v1@92.663,114.935 ; v1(83.82,94.996) 87.884,94.996 v1(92.71,99.822) ; v1(126.493,115.698) 132.46,115.698 U1.3@133.477,114.681
  Bottom Layer w1: v1(101.473,120.777) v1(112.522,120.777)
AIN1N: J1.5 R37.1 | length 4
  Top Layer w0.3: J1.5 R37.1@71.757,92.847
AIN1P: J1.2 R38.1 | length 6.2
  Top Layer w0.3: J1.2@65.537,87.757 R38.1
AIN2N: J2.5 R35.1 | length 3.9
  Top Layer w0.3: J2.5 R35.1@71.757,102.372
AIN2P: J2.2 R36.1 | length 6.1
  Top Layer w0.3: J2.2@65.664,97.282 R36.1@71.767,97.282
AIN3N: J3.5 R33.1 | length 3.9
  Top Layer w0.3: J3.5 R33.1@71.757,111.516
AIN3P: J3.2 R34.1 | length 6.1
  Top Layer w0.3: J3.2@65.664,106.426 R34.1
AIN4N: J4.5 R31.1 | length 4
  Top Layer w0.3: J4.5 R31.1@71.767,119.771
AIN4P: J4.2 R32.1 | length 6.2
  Top Layer w0.3: J4.2 R32.1@71.767,114.671
BOOT0: R12.1 U6.44 | length 7
  Top Layer w0.3: R12.1 104.14,101.473 106.399,103.732 U6.44
BOOT1: R13.2 U6.20 | length 2.9
  Top Layer w0.3: U6.20 119.341,105.232 R13.2
CLK: CLK.0 U7.37 | length 16.6
  Top Layer w0.254: v2(89.916,105.41) U7.37@92.288,105.41
  Bottom Layer w0.254: CLK.0 81.153,96.647 v2(89.916,105.41)
DGND: C31.1 C32.1 C33.1 C34.1 C35.1 C36.1 C37.1 C38.1 C39.1 C41.1 C69.1 C70.1 DGND.0 P3.5 P3.6 P5.4 R6.2 R45.1 R46.1 R47.1 R49.1 U6.8 U6.23 U6.35 U6.47 U7.41 | length 155.8
  Top Layer w0.3: U7.41 94.238,107.438 95.504,106.172 96.774,106.172 97.663,107.061 R49.1 ; C34.1@106.748,102.232 U6.47 110.614,102.232 112.141,103.759 ; 110.99,109.866 U6.35 110.99,107.704 112.141,106.553 ; 111.962,106.732 U6.23 119.497,106.732 C32.1 ; 112.141,103.505 113.99,101.656 U6.8 113.994,100.453 113.994,98.479 113.99,98.475 113.99,96.638 C38.1
  Top Layer w0.5: C36.1 C37.1
  Top Layer w0.6: P3.6 P3.5 95.25,91.567 101.092,97.409 105.537,97.409 ; C34.1 106.594,102.3 105.537,101.243 105.537,97.409 ; C36.1 109.055,96.077 108.163,95.185 C31.1 107.761,95.185 105.537,97.409
  Top Layer w0.8: C69.1 C70.1 97.905,112.345 R45.1 R47.1 R46.1 R49.1 ; R47.1@98.094,109.92 110.744,109.92 ; C38.1 C39.1 ; C32.1 122.707,107.95 DGND.0 132.232,98.425 R6.2
  Top Layer w1: 112.141,103.505 112.141,106.553 ; C41.1@151.319,82.55 151.319,86.295 P5.4
  Bottom Layer w0.8: DGND.0 130.073,89.51 134.493,85.09 150.114,85.09 P5.4
DVDD+3.3V: 3.3V.0 C5.1 C31.2 C32.2 C33.2 C34.2 C35.2 C41.2 C69.2 C70.2 L5.1 P3.1 P3.2 P4.2 P5.1 Q1.3 R44.1 R48.1 R50.1 R51.1 U2.2 U6.1 U6.24 U6.36 U6.48 U7.48 U7.50 | length 196.4
  Top Layer w0.3: R44.1 91.047,114.923 89.991,113.867 U7.50 89.991,111.812 90.865,110.938 U7.48 ; C34.2 107.512,101.732 U6.48 U6.1
  Top Layer w0.5: P4.2 110.363,83.566 115.189,88.392 117.983,88.392 118.872,89.281 118.872,91.059 117.983,91.948 v1(115.189,91.948)
  Top Layer w0.6: C34.2 v1(106.68,97.982) C31.2 ; v1(115.189,97.917) L5.1 ; 117.411,107.379 117.983,107.95 C32.2
  Top Layer w0.8: 92.658,111.138 C70.2 C69.2 ; R48.1 R51.1 97.905,101.993 98.212,102.3 v1(102.362,102.3) ; P3.2 P3.1 3.3V.0@100.33,92.71 ; v1(102.3,108.52) C35.2 C33.2 110.236,108.52 ; C32.2 119.315,108.393 v1(119.856,108.934) 120.396,109.474 122.936,109.474 v1(129.159,103.251) ; C5.1 143.321,104.521 U2.2 146.05,104.521 148.463,102.108 148.463,100.203 ; v1(144.78,96.52) 148.463,100.203 ; v1(146.177,93.345) 153.543,93.345 156.591,90.297 156.591,83.185 ; Q1.3@148.463,99.423 148.463,100.203
  Top Layer w1: C41.2 151.7,80.899 154.305,80.899 156.591,83.185
  Bottom Layer w0.6: v1(115.189,91.948) v1@115.189,97.79
  Bottom Layer w0.8: v1(93.98,112.395) 98.933,112.395 102.3,109.028 v1(102.3,108.52) 102.3,102.362 v1(102.362,102.3) v1(106.68,97.982) ; 3.3V.0@100.33,92.71 101.408,92.71 v1(106.68,97.982) ; v1(108.712,108.585) 119.507,108.585 v1(119.856,108.934) ; v1@115.189,97.79 111.119,97.79 111.077,97.832 110.411,97.832 110.369,97.79 106.872,97.79 v1(106.68,97.982) ; v1(129.159,103.251) v1(141.986,103.251) ; v1(144.78,96.52) 144.78,94.742 v1(146.177,93.345)
EN: C1.2 L1.1 P1.1 P2.1 R3.2 U1.6 U1.9 | length 52.9
  Top Layer w0.3: U1.9 131.202,113.654 130.937,113.919 130.937,115.189 132.502,116.754 U1.6
  Top Layer w0.5: U1.6 132.502,119.179 R3.2 135.181,121.858 C1.2 ; P1.1 159.101,96.617 159.258,96.774
  Top Layer w1: C1.2 141.794,121.858 P2.1 158.369,105.283 158.369,100.584 159.258,99.695 159.258,96.774
FIN1: P4.3 R14.1 U6.10 | length 41.6
  Top Layer w0.2: R14.1 106.553,82.677 109.093,80.137 111.76,80.137 ; P4.3 111.76,80.137 ; U6.10 114.99,99.386 v2(115.443,98.933) ; v2(115.951,92.71) 118.364,92.71 120.142,90.932 120.142,89.535 114.681,84.074 113.157,84.074 111.76,82.677 111.76,80.137
  Bottom Layer w0.2: v2(115.443,98.933) 115.951,98.425 v2(115.951,92.71)
FIN2: P4.4 R15.1 U6.11 | length 41.9
  Top Layer w0.2: R15.1 105.029,81.661 v2(106.045,80.645) ; P4.4 120.542,89.173 120.542,91.294 118.618,93.218 v2(116.586,93.218) ; U6.11 115.49,99.775 v2(116.459,98.806)
  Bottom Layer w0.2: v2(106.045,80.645) 106.156,80.534 111.903,80.534 P4.4 ; v2(116.459,98.806) 116.459,93.345 v2(116.586,93.218)
FIN3: P4.5 R16.1 U6.12 | length 42.5
  Top Layer w0.2: R16.1 104.521,80.264 v2(104.775,80.01) ; P4.5 114.3,80.137 114.3,81.915 120.942,88.557 120.942,91.656 118.872,93.726 v2(117.348,93.726) ; U6.12 115.99,100.291 v2(117.348,98.933)
  Bottom Layer w0.2: v2(104.775,80.01) 114.427,80.01 P4.5 ; v2(117.348,93.726) v2(117.348,98.933)
FIN4: P4.6 R17.1 U6.13 | length 48.6
  Top Layer w0.2: R17.1 101.6,79.248 102.87,77.978 116.078,77.978 116.713,78.613 116.713,79.756 115.443,81.026 P4.6 121.342,87.433 121.342,98.749 118.359,101.732 U6.13
FIN5: P4.7 R18.1 U6.14 | length 46
  Top Layer w0.2: R18.1 101.6,77.47 116.459,77.47 P4.7 117.983,79.375 116.84,80.518 116.84,82.042 121.742,86.944 121.742,98.984 118.494,102.232 U6.14
FIN6: P4.8 R19.1 U6.15 | length 39.2
  Top Layer w0.2: U6.15 118.756,102.732 122.142,99.346 122.142,85.693 P4.8 118.999,80.518 118.999,78.74 120.269,77.47 127.52,77.47 R19.1
FIN7: P4.9 R20.1 U6.16 | length 41.3
  Top Layer w0.2: U6.16 119.018,103.232 122.542,99.708 122.542,85.077 119.38,81.915 119.38,80.137 P4.9 121.666,77.851 125.222,77.851 126.746,79.375 R20.1
FIN8: P4.10 R21.1 U6.17 | length 35.1
  Top Layer w0.2: U6.17 119.153,103.732 122.942,99.943 122.942,83.953 P4.10 ; v2(126.365,80.264) 127.901,80.264 R21.1
  Bottom Layer w0.2: P4.10 121.793,80.264 v2(126.365,80.264)
FIN9: P4.11 R22.1 U6.18 | length 39.6
  Top Layer w0.2: U6.18 119.363,104.232 123.342,100.253 123.342,83.227 122.063,81.948 122.063,81.12 123.063,80.12 P4.11 125.857,81.788 131.203,81.788 R22.1@131.457,81.534
FIN10: P4.12 R23.1 U6.19 | length 32.9
  Top Layer w0.2: U6.19 119.55,104.732 123.742,100.54 123.742,84.963 ; P4.12 123.742,82.213 123.742,84.963 ; R23.1 126.25,84.963 123.742,84.963
NetC8_1: C8.1 U3.3 | length 4.7
  Top Layer w0.3: U3.3 121.289,115.828 122.109,116.648 C8.1
NetC8_2: C8.2 U3.5 | length 2.1
  Top Layer w0.3: U3.5 124.521,117.728 C8.2
NetC9_2: C9.2 C10.2 L2.1 U3.1 | length 6.2
  Top Layer w0.3: L2.1 118.59,117.728 U3.1 ; U3.1@120.458,117.736 C9.2 C10.2
NetC13_2: C13.2 U4.4 | length 3
  Top Layer w0.3: U4.4 C13.2@140.536,88.646
NetC14_2: C14.2 C15.2 L3.1 U4.5 | length 6
  Top Layer w0.3: L3.1 C14.2@139.127,93.853 ; U4.5@137.598,90.546 C15.2 C14.2
NetC18_2: C18.2 U5.4 | length 3.1
  Top Layer w0.3: U5.4@107.758,117.664 C18.2
NetC19_2: C19.2 C20.2 L4.1 U5.5 | length 7
  Top Layer w0.3: U5.5 107.099,120.099 L4.1 107.418,122.62 C19.2 C20.2
NetC37_2: C37.2 R24.1 Y1.2 | length 7.6
  Top Layer w0.2: C37.2 112.141,95.185 113.08,95.185 R24.1 113.03,92.896 Y1.2@115.629,90.297
NetC51_2: C51.2 R31.2 U7.9 | length 18.5
  Top Layer w0.3: R31.2@73.217,119.749 78.105,114.861 78.105,108.966 80.133,106.938 U7.9 ; C51.2@73.267,117.971 R31.2
NetC52_1: C52.1 R32.2 U7.10 | length 16
  Top Layer w0.3: R32.2@73.217,114.719 C52.1 ; C52.1@73.267,116.447 77.216,112.498 77.216,108.712 79.49,106.438 U7.10
NetC53_2: C53.2 R33.2 U7.11 | length 11.2
  Top Layer w0.3: R33.2 73.267,109.778 77.107,105.938 U7.11
NetC54_1: C54.1 R34.2 U7.12 | length 9.9
  Top Layer w0.3: R34.2@73.217,106.476 C54.1 ; R34.2 73.533,106.426 74.521,105.438 U7.12
NetC55_2: C55.2 R35.2 U7.13 | length 10.9
  Top Layer w0.3: C55.2@73.267,100.634 R35.2 73.267,102.731 75.474,104.938 U7.13
NetC56_1: C56.1 R36.2 U7.14 | length 11.5
  Top Layer w0.3: R36.2@73.217,97.332 C56.1@73.217,98.617 ; C56.1 78.595,104.438 U7.14
NetC57_2: C57.2 R37.2 U7.15 | length 16.9
  Top Layer w0.3: C57.2@73.267,91.109 R37.2 74.676,94.246 74.676,98.806 79.808,103.938 U7.15
NetC58_1: C58.1 R38.2 U7.16 | length 18.9
  Top Layer w0.3: R38.2@73.217,87.807 C58.1 75.565,91.629 75.565,97.837 U7.16
NetC61_2: C61.2 C62.2 U7.55 | length 5.9
  Top Layer w0.3: C61.2 86.676,116.524 87.491,115.709 U7.55
NetC71_2: C71.2 U7.26 | length 6.9
  Top Layer w0.3: U7.26 87.491,99.772 C71.2
NetC72_1: C72.1 C73.1 U7.24 | length 7.5
  Top Layer w0.3: U7.24 86.491,99.183 87.946,97.728 C72.1
  Top Layer w0.8: C73.1 C72.1
NetC74_2: C74.2 U7.28 | length 7.1
  Top Layer w0.3: U7.28 88.491,100.358 C74.2@92.645,96.204
NetC75_2: C75.2 U7.30 | length 8.2
  Top Layer w0.3: U7.30 89.491,100.12 92.456,97.155 93.664,97.155 C75.2
NetL1_2: L1.2 U1.1 U1.2 | length 9.3
  Top Layer w1: 135.382,117.475 138.627,117.475 L1.2
NetP3_3: P3.3 R12.2 | length 14.5
  Top Layer w0.3: P3.3 97.79,92.075 v2(101.6,95.885) ; v2(101.6,98.933) R12.2@104.128,98.933
  Bottom Layer w0.3: v2(101.6,95.885) v2(101.6,98.933)
NetP3_4: P3.4 R13.1 | length 50.8
  Top Layer w0.3: R13.1 127,100.191 v2(127,96.52) ; v2(127,88.9) v2(127,91.567)
  Bottom Layer w0.3: P3.4 99.187,84.582 122.682,84.582 v2(127,88.9) ; v2(127,91.567) v2(127,96.52)
NetQ1_1: Q1.1 R2.1 | length 5.2
  Top Layer w0.3: Q1.1@147.513,97.173 147.87,96.816 149.86,98.806 151.396,98.806 R2.1
NetQ1_2: Q1.2 R1.2 | length 2.5
  Top Layer w0.3: R1.2 149.413,96.593 Q1.2@149.413,97.173
NetR3_1: R3.1 R4.2 U1.7 | length 7.9
  Top Layer w0.3: R4.2 R3.1 131.852,120.029 U1.7
NetR5_1: R5.1 U1.10 | length 2.4
  Top Layer w0.3: U1.10 131.852,110.476 R5.1
NetR44_2: R44.2 U7.52 | length 4.1
  Top Layer w0.3: U7.52 88.991,115.661 89.547,116.217 R44.2
NetR45_2: R45.2 U7.46 | length 4.7
  Top Layer w0.3: U7.46 94.964,109.938 R45.2@96.405,111.379
NetR46_2: R46.2 U7.44 | length 4.2
  Top Layer w0.3: U7.44 95.798,108.938 R46.2@96.278,108.458
NetR47_2: R47.2 U7.45 | length 4.4
  Top Layer w0.3: U7.45 95.734,109.438 R47.2
NetR49_2: R49.2 U7.42 | length 4.4
  Top Layer w0.3: U7.42 94.374,107.938 95.378,106.934 R49.2@96.278,106.934
NetR50_2: R50.2 U7.36 | length 4.6
  Top Layer w0.3: U7.36 93.562,104.938 94.741,103.759 R50.2@96.405,103.759
NetR51_2: R51.2 U7.35 | length 5
  Top Layer w0.3: U7.35 93.425,104.438 95.628,102.235 R51.2@96.405,102.235
NRST: U6.7
RCC_OSC_IN: C36.2 U6.5 Y1.1 | length 14
  Top Layer w0.3: Y1.1@107.129,90.297 v2(109.855,93.023) C36.2 ; v2(110.744,97.028) 110.744,97.918 112.49,99.664 U6.5
  Bottom Layer w0.3: v2(109.855,93.023) 110.744,93.912 v2(110.744,97.028)
RCC_OSC_OUT: R24.2 U6.6 | length 4.2
  Top Layer w0.3: R24.2@112.99,96.635 112.522,97.103 112.522,99.06 112.99,99.528 U6.6
REF_ELEC: P6.2 R39.2 | length 6.5
  Top Layer w0.8: R39.2@77.978,86.348 77.978,83.82 P6.2
REF_ELECN: C59.2 R39.1 U9.3 | length 3.3
  Top Layer w0.3: R39.1@79.44,86.41 C59.2 U9.3@81.162,88.011
SPI_CLK: SCLK.0 U6.39 U7.40 | length 27.4
  Top Layer w0.3: U7.40 93.849,106.938 v2(94.869,105.918) ; v2(100.203,106.172) 100.263,106.232 U6.39
  Bottom Layer w0.3: SCLK.0 96.545,100.813 95.55,101.808 94.005,101.808 93.218,102.595 93.218,104.267 v2(94.869,105.918) 95.169,106.218 100.157,106.218 v2(100.203,106.172)
SPI_CS: CS.0 R48.2 U6.38 U7.39 | length 22.7
  Top Layer w0.3: U7.39 93.46,106.438 94.869,105.029 96.151,105.029 96.405,105.283 96.774,105.283 97.663,106.172 98.552,106.172 99.112,106.732 104.14,106.732 ; v2(104.14,107.315) 104.14,106.732 ; U6.38 104.14,106.732
  Bottom Layer w0.3: CS.0@104.14,103.403 v2(104.14,107.315)
SPI_DRDY: DRDY.0 U6.29 U7.47 | length 27.8
  Top Layer w0.3: U7.47 94.182,110.438 v2(94.869,111.125) ; v2(98.806,111.125) 99.822,112.141 v2(112.776,112.141) ; 101.498,112.166 DRDY.0 ; U6.29 113.99,109.418 114.554,109.982 v2(114.935,109.982)
  Bottom Layer w0.3: v2(94.869,111.125) v2(98.806,111.125) ; v2(112.776,112.141) v2(114.935,109.982)
SPI_MISO: P8.2 U6.40 | length 12.2
  Top Layer w0.254: v2(106.426,105.664) 106.494,105.732 U6.40
  Bottom Layer w0.254: v2(106.426,105.664) 107.569,106.807 107.569,112.395 P8.2
SPI_MOSI: P8.1 U6.41 | length 13.3
  Top Layer w0.254: v2(105.283,105.283) 105.537,105.029 107.188,105.029 107.391,105.232 U6.41
  Bottom Layer w0.254: v2(105.283,105.283) 106.553,106.553 P8.1
SPI_SIN: P7.1 SI.0 U7.34 | length 14.5
  Top Layer w0.254: U7.34 93.166,103.938 94.234,102.87 v2(94.234,102.362) 94.234,100.736 SI.0
  Bottom Layer w0.254: P7.1 94.513,95.529 SI.0
SPI_SOUT: P7.2 SO.0 U7.43 | length 27
  Top Layer w0.254: U7.43 94.889,108.438 v2(95.25,108.077)
  Bottom Layer w0.254: P7.2 101.117,99.593 SO.0 101.117,106.528 99.568,108.077 v2(95.25,108.077)
SPI_START: START.0 U6.42 U7.38 | length 23.4
  Top Layer w0.3: U7.38 93.198,105.938 94.742,104.394 v2(95.377,104.394) ; v2(99.441,104.521) 108.253,104.521 108.464,104.732 U6.42
  Bottom Layer w0.3: v2(95.377,104.394) 99.314,104.394 v2(99.441,104.521) 99.441,99.67 START.0
SRB1: U7.17 U9.1 U9.4 | length 18.7
  Top Layer w0.3: U9.1 81.849,89.85 v2(82.423,90.424) ; v2(82.991,97.155) U7.17 ; U9.4 84.77,87.95 v2(85.09,87.63)
  Bottom Layer w0.3: v2(82.423,90.424) 82.991,90.992 ; v2(82.991,97.155) 82.991,90.992 ; v2(85.09,87.63) 85.09,88.893 82.991,90.992
SWCLK: P5.3 U6.37 | length 69.5
  Top Layer w0.3: U6.37 110.192,107.232 110.871,106.553 v1(110.871,104.013)
  Bottom Layer w0.3: v1(110.871,104.013) 119.253,104.013 126.873,111.633 140.97,111.633 154.686,97.917 154.686,87.122 P5.3
SWDIO: P5.2 U6.34 | length 70.6
  Top Layer w0.3: U6.34 v1@111.49,111.109
  Bottom Layer w0.3: v1(111.506,111.125) 111.506,111.887 112.903,113.284 141.859,113.284 155.448,99.695 155.448,85.344 P5.2
USB_ENABLE: R1.1 U6.31 | length 41.3
  Top Layer w0.3: U6.31 112.99,109.434 114.092,110.536 123.525,110.536 134.366,99.695 v1(134.62,99.695)
  Top Layer w0.6: v1(140.716,97.663) 143.129,95.25 R1.1
  Bottom Layer w0.3: v1(134.62,99.695) 138.684,99.695 v1(140.716,97.663)
USB_OTG_FS_DM: P1.2 U6.32 | length 51.8
  Top Layer w0.3: U6.32 112.49,109.696 113.792,110.998 123.952,110.998 134.239,100.711 v1(135.89,100.711)
  Top Layer w0.5: v1@151.145,97.267 P1.2@156.886,97.267
  Top Layer w0.6: v1(151.13,97.282) v1@151.145,97.267
  Bottom Layer w0.3: v1(135.89,100.711) 141.107,100.711 142.696,99.122 149.29,99.122 v1(151.13,97.282)
USB_OTG_FS_DP: P1.3 R2.2 U6.33 | length 53.3
  Top Layer w0.3: U6.33 111.99,109.958 113.538,111.506 124.333,111.506 134.112,101.727 v1(137.287,101.727) ; R2.2 154.293,97.917 P1.3
  Top Layer w0.6: v1(149.987,99.822) 150.495,100.33 151.88,100.33 R2.2
  Bottom Layer w0.3: v1(137.287,101.727) 140.728,101.727 142.544,99.911 v1@149.898,99.911
VDDA: C38.2 C39.2 L5.2 U6.9 | length 7.6
  Top Layer w0.3: U6.9 114.489,100.456 114.489,97.539 C38.2
  Top Layer w0.6: C39.2@117.475,96.585 L5.2@117.475,97.917
  Top Layer w0.8: C38.2 C39.2@117.475,96.585
pads on no net: J1.1 J1.3 J1.6 J2.1 J2.3 J2.6 J3.1 J3.3 J3.6 J4.1 J4.3 J4.6 P1.0 P1.4 P4.1 P6.1 U1.12 U1.16 U2.4 U6.2 U6.3 U6.4 U6.21 U6.22 U6.25 U6.26 U6.27 U6.28 U6.30 U6.43 U6.45 U6.46 U7.1 U7.2 U7.3 U7.4 U7.5 U7.6 U7.7 U7.8 U7.18 U7.27 U7.29 U7.61 U7.63

## Keep-outs
Keep-Out Layer:
  circle w0.254: c60.325,78.74 r1
  circle w0.254: c158.75,123.19 r1
  circle w0.254: c60.325,123.19 r1
  circle w0.254: c69.723,80.899 r3.05
  lines w0.254: 57.785,78.74 ccw(c60.325,78.74) 60.325,76.2 158.75,76.2 ccw(c158.75,78.74) 161.29,78.74 161.29,123.19 ccw(c158.75,123.19) 158.75,125.73 60.325,125.73 ccw(c60.325,123.19) 57.785,123.19 57.785,78.74

## Silkscreen, mask and mechanical layers (free items; w line width, h text height)
Top Overlay:
  text "MISO" at 111.125,113.665 h0.76
  text "MOSI" at 104.394,112.395 h0.76 r90
  text "SO" at 95.885,91.059 h0.76
  text "SI" at 88.138,90.932 h0.76
  text "REF" at 79.883,83.185 h0.76
  text "DG_V2.0 Shihan" at 79.502,77.597 h0.76

## Text inside footprints (layer, text, board x,y; h text height)
P3: Top Overlay "1" at 102.489,88.138 h0.76; Top Overlay "2" at 102.362,85.598 h0.76; Top Overlay "5" at 92.837,88.138 h0.76; Top Overlay "6" at 92.837,85.598 h0.76
P4: Top Overlay "12" at 124.968,82.55 h0.76; Top Overlay "1" at 126.238,78.359 h0.76; Top Overlay "1" at 125.349,78.359 h0.76; Top Overlay "1" at 108.077,78.613 h0.76; Top Overlay "2" at 107.823,81.026 h0.76